# Altium PCB carrier board Ultrafiltrasi.PcbDoc (part 1 of 4)
Units mm, origin at the board's own origin, x right, y up, seen from the top; angles counter-clockwise.
Board outline 196.34 x 220.85 mm, 2 copper layers (Top Layer, Bottom Layer); 114 components, 209 nets, 667 pads, 70 vias.
Unrouted connection lines stored in the file: 5.
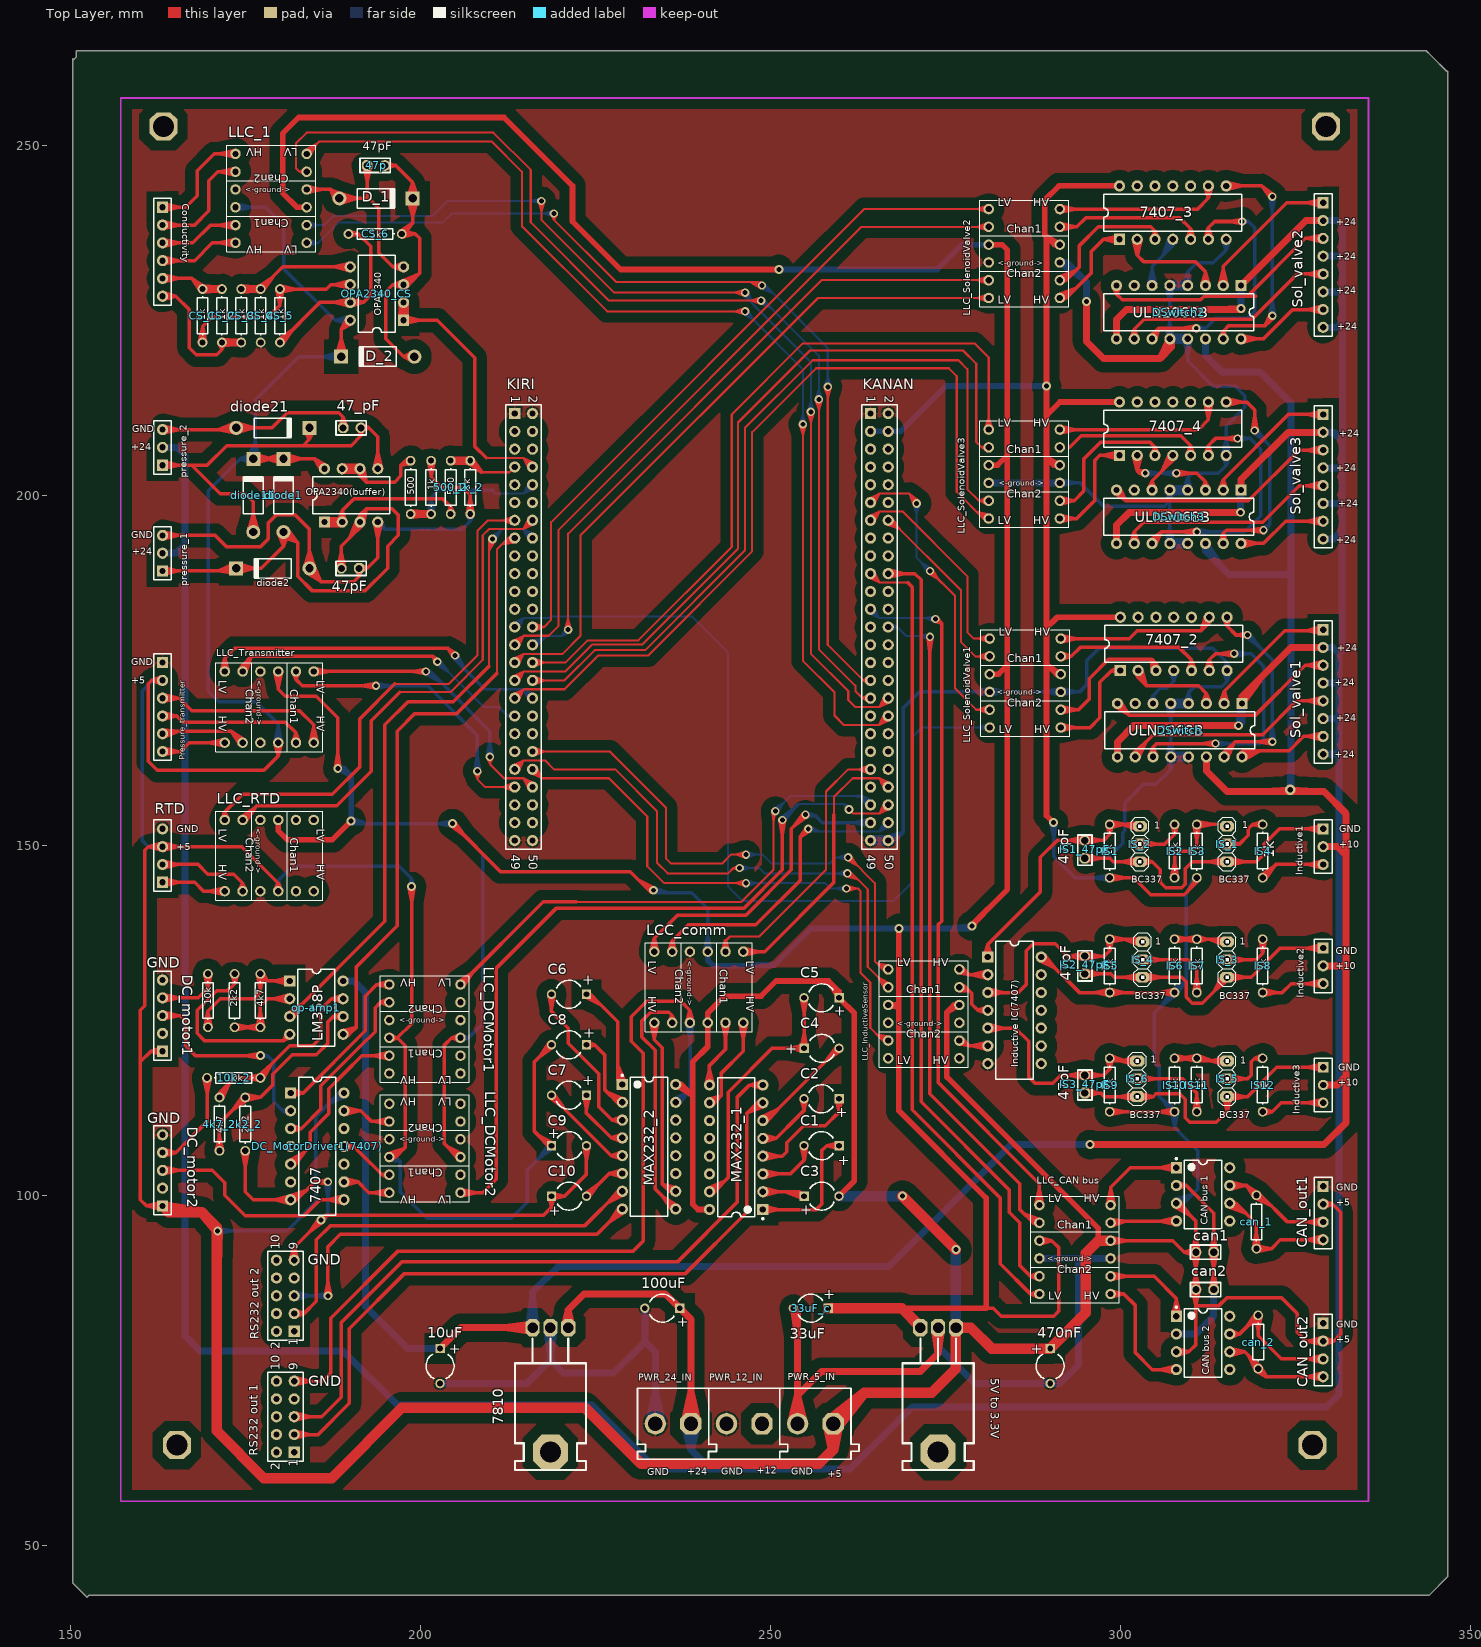
[diagram p0: Top Layer view]
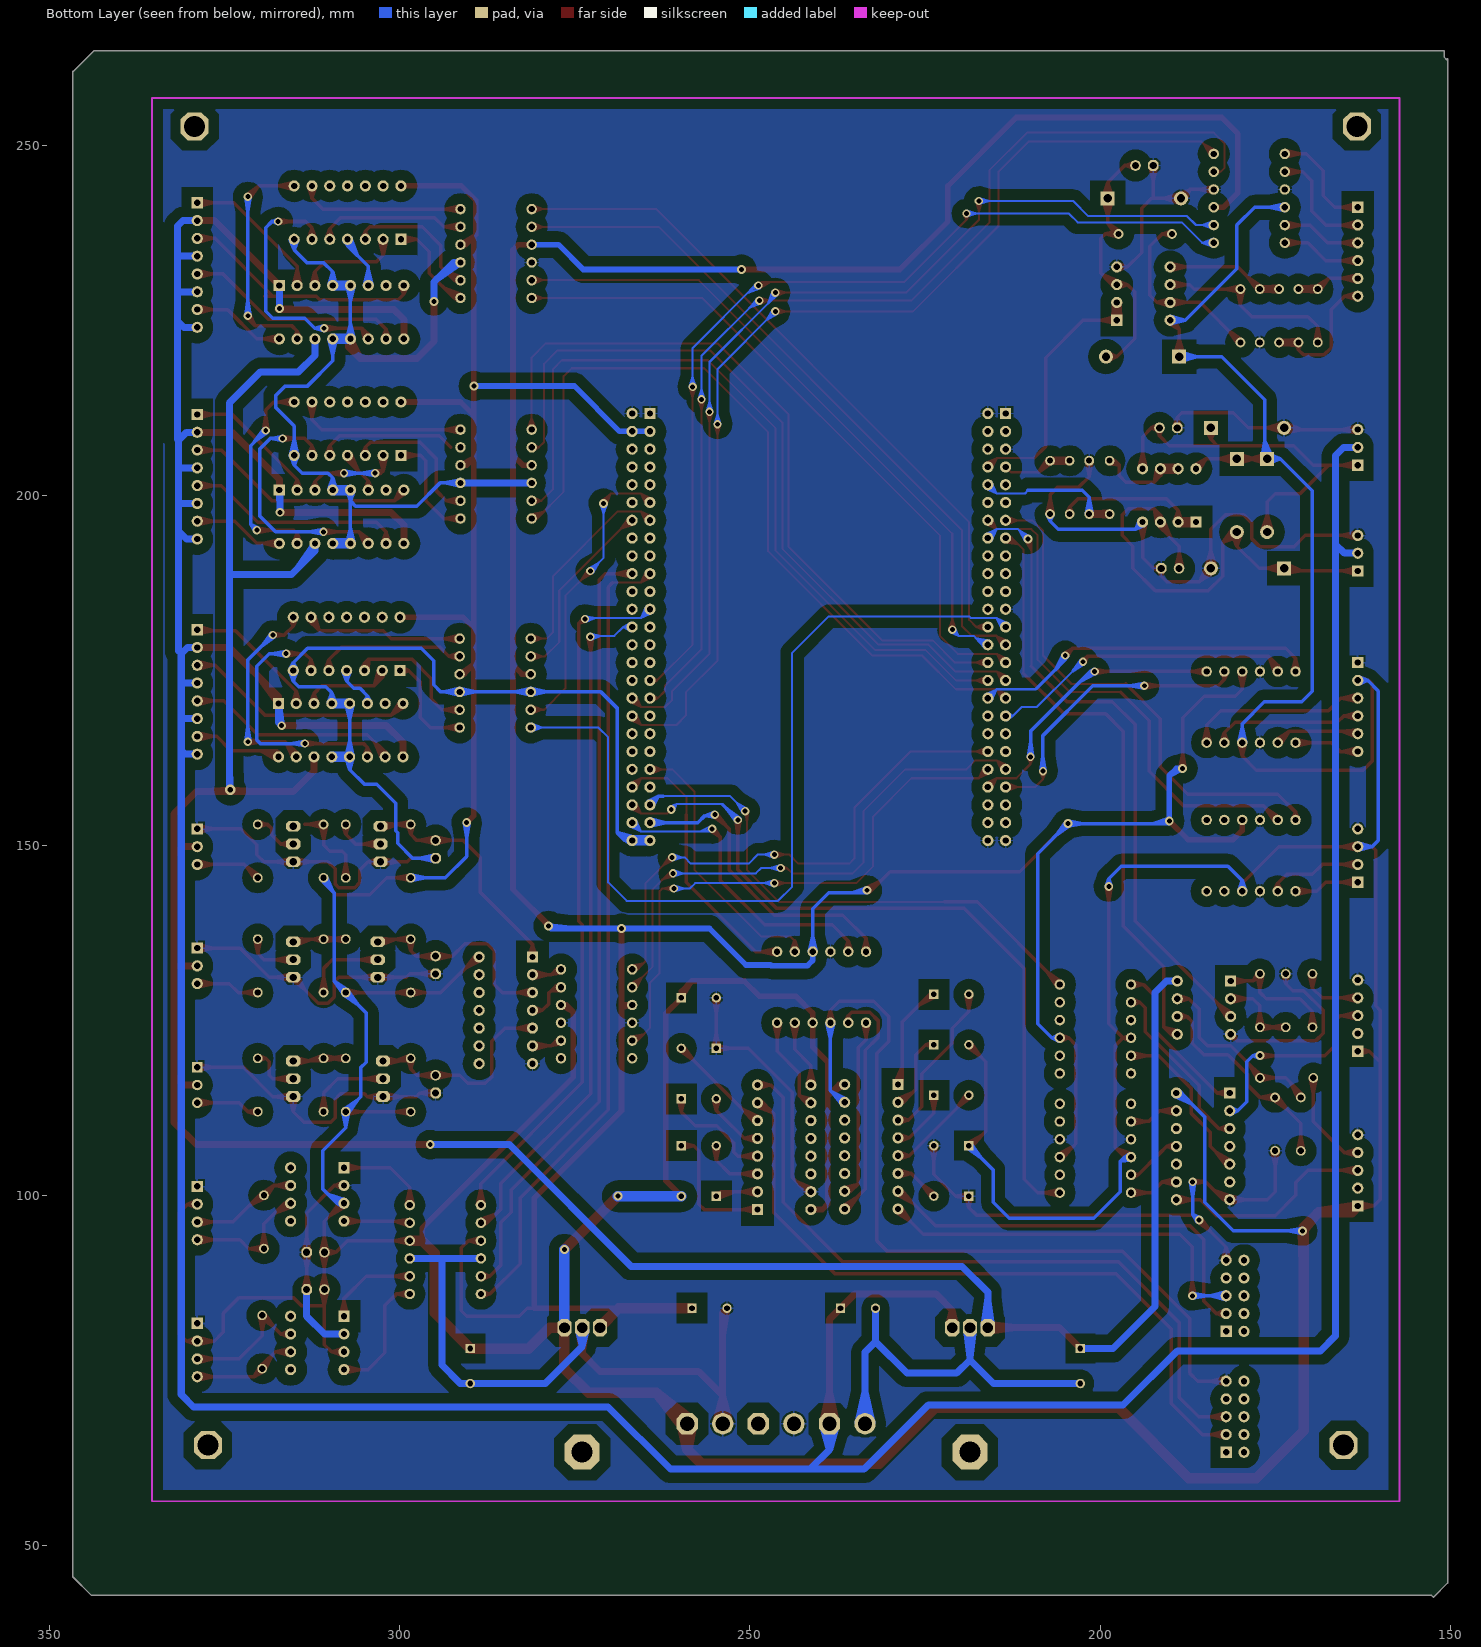
[diagram p1: Bottom Layer view, seen from below]

## Layer stack, top to bottom
Top Solder: solder mask 0.0102, Solder Resist, Dk 3.5
Top Layer: signal copper 0.0356
Dielectric 1: dielectric 0.32, FR-4, Dk 4.8
Bottom Layer: signal copper 0.0356
Bottom Solder: solder mask 0.0102, Solder Resist, Dk 3.5

## Board outline
150.368,262.382 150.368,44.704 152.4,42.672 152.654,42.926 342.646,42.926 344.043,42.926 346.71,45.593 346.71,260.604 346.583,260.604 344.424,262.763 343.662,263.525 150.876,263.525 150.876,262.636 150.495,262.255

## Design rules (kind name [scope] priority, off if disabled: settings)
Clearance [All] p1: gap=0.3
PolygonConnect [All] p1: connectstyle=Relief reliefconductorwidth=0.254 reliefentries=4 polygonreliefangle="90 Angle" airgapwidth=0.254
RoutingVias [All] p1: holewidth=0.711 width=1.27 viastyle="Through Hole" minholewidth=0.711 minwidth=1.27 maxholewidth=0.711 maxwidth=1.27
SolderMaskExpansion [All] p1: expansion=0.102
Width [All] p1: maxlimit=2 minlimit=0.3 preferedwidth=0.5 minimp=50.000000 maximp=50.000000 favimp=50.000000
29 further rules are at their usual default settings.

## Components (designator, comment, footprint, x,y, rotation, side; value= is the part's Value field where it differs from the comment)
1k "Res1" AXIAL-0.3#1 201.549,201.168 r270 top
1k_2 "1k" AXIAL-0.3#1 207.137,201.168 r90 top
2k2 "Res1" AXIAL-0.3#2 173.482,127.889 r270 top
2k2_2 "2k2" AXIAL-0.3#2 175.006,110.236 r90 top
4k7 "Res1" AXIAL-0.3#2 177.165,127.889 r90 top
4k7_2 "4k7" AXIAL-0.3#2 171.323,110.236 r90 top
"5V to 3.3V" "7805" My_TO-220 276.479,81.153 r180 top
10k "Res1" AXIAL-0.3#2 169.672,127.889 r90 top
10k_2 "10k" AXIAL-0.3#2 173.355,116.84 r180 top
10uF "Cap2" CAPR5-4X5 202.819,75.692 r270 top
33uF_c "33uF" CAPR5-4X5 255.778,83.947 r180 top
47_pF "Cap" My_cap100n 190.246,209.677 r0 top
47p "47pF" My_cap100n 193.675,247.142 r0 top
47pF "Cap" My_cap100n 189.992,189.611 r180 top
100uF "Cap2" CAPR5-4X5 234.569,83.947 r180 top
470nF "Cap2" CAPR5-4X5 289.941,75.692 r270 top
500 "Res1" AXIAL-0.3#1 198.628,201.168 r90 top
500_2 "500" AXIAL-0.3#1 204.343,201.168 r270 top
7407_2 "7407" 646-06 307.594,178.816 r0 top
7407_3 "7407" 646-06 307.467,240.411 r0 top
7407_4 "7407" 646-06 307.467,209.55 r0 top
7810 "7805" My_TO-220 221.107,81.153 r180 top
C1 "Cap2" CAPR5-4X5 257.302,107.156 r180 top
C2 "Cap2" CAPR5-4X5 257.302,113.855 r180 top
C3 "Cap2" CAPR5-4X5 257.302,99.949 r0 top
C4 "Cap2" CAPR5-4X5 257.302,121.063 r0 top
C5 "Cap2" CAPR5-4X5 257.302,128.27 r180 top
C6 "Cap2" CAPR5-4X5 221.234,128.778 r180 top
C7 "Cap2" CAPR5-4X5 221.234,114.364 r180 top
C8 "Cap2" CAPR5-4X5 221.234,121.571 r180 top
C9 "Cap2" CAPR5-4X5 221.234,107.156 r0 top
C10 "Cap2" CAPR5-4X5 221.234,99.949 r0 top
can1 "Cap" My_cap100n 312.039,91.948 r180 top
can2 "Cap" My_cap100n 312.039,86.614 r180 top
"CAN bus 1" "MCP2551-I/P" PDIP300-P8 311.785,100.203 r0 top
"CAN bus 2" "MCP2551-I/P" PDIP300-P8 311.785,78.994 r0 top
can_1 "Res1" AXIAL-0.3#2 319.405,96.266 r90 top
can_2 "Res1" AXIAL-0.3#2 319.659,79.121 r90 top
CAN_out1 "Header 4" HDR1X4 328.93,101.346 r270 top
CAN_out2 "Header 4" HDR1X4 328.93,81.788 r270 top
Conductivity "Header 6" HDR1X6 163.195,241.173 r270 top
CS_1 "1k" AXIAL-0.3#2 168.91,225.679 r270 top
CS_2 "1k" AXIAL-0.3#2 171.672,225.679 r90 top
CS_3 "1k" AXIAL-0.3#2 174.434,225.679 r90 top
CS_4 "1k" AXIAL-0.3#2 177.197,225.679 r90 top
CS_5 "1k" AXIAL-0.3#2 179.959,225.679 r270 top
CS_6 "1k" AXIAL-0.3#2 193.548,237.363 r0 top
D_1 "1N4001" DO-41 193.675,242.443 r0 top
D_2 "1N4001" DO-41 193.929,219.837 r180 top
DC_motor1 "Header 5" HDR1X5 163.195,120.65 r90 top
DC_motor2 "Header 5" HDR1X5 163.195,98.552 r90 top
DC_MotorDriver1(7407) "7407" 646-06 185.293,107.061 r270 top
diode1 "1N4001" DO-41 180.467,200.025 r90 top
diode2 "1N4001" DO-41 178.943,189.611 r180 top
diode11 "1N4001" DO-41 176.149,200.025 r90 top
diode21 "1N4001" DO-41 178.943,209.677 r0 top
DSwitch "ULN2068B" 648C-02 308.444,166.497 r180 top
DSwitch2 "ULN2068B" 648C-02 308.317,226.187 r180 top
DSwitch3 "ULN2068B" 648C-02 308.317,196.977 r180 top
Inductive1 "Header 3" HDR1X3#1 328.93,152.4 r270 top
Inductive2 "Header 3" HDR1X3#1 328.93,135.382 r270 top
Inductive3 "Header 3" HDR1X3#2 328.93,118.364 r270 top
"Inductive IC(7407)" "SN74LS14N" 646-06 284.861,126.492 r270 top
IS1 "1k" AXIAL-0.3#2 298.45,149.225 r90 top
IS1_47pF "47pF" My_cap100n 294.894,149.479 r90 top
IS2 "1k" AXIAL-0.3#2 307.721,149.225 r270 top
IS2_47pF "47pF" My_cap100n 294.894,132.969 r90 top
IS3 "1k" AXIAL-0.3#2 310.896,149.225 r90 top
IS3_47pF "47pF" My_cap100n 294.894,115.951 r90 top
IS4 "1k" AXIAL-0.3#2 320.294,149.225 r270 top
IS5 "1k" AXIAL-0.3#2 298.45,132.842 r90 top
IS6 "1k" AXIAL-0.3#2 307.721,132.842 r90 top
IS7 "1k" AXIAL-0.3#2 310.896,132.842 r90 top
IS8 "1k" AXIAL-0.3#2 320.294,132.842 r270 top
IS9 "1k" AXIAL-0.3#2 298.45,115.824 r90 top
IS10 "1k" AXIAL-0.3#2 307.721,115.824 r90 top
IS11 "1k" AXIAL-0.3#2 310.896,115.824 r90 top
IS12 "1k" AXIAL-0.3#2 320.294,115.824 r270 top
IS_1 "BC337" My_1X03 315.214,150.241 r270 top
IS_2 "BC337" My_1X03 302.768,150.241 r270 top
IS_3 "BC337" My_1X03 315.214,133.731 r270 top
IS_4 "BC337" My_1X03 303.149,133.731 r270 top
IS_5 "BC337" My_1X03 315.214,116.713 r270 top
IS_6 "BC337" My_1X03 302.387,116.713 r270 top
KANAN "KANAN" HDR2X25 264.287,211.709 r270 top
KIRI "KIRI" HDR2X25 213.487,211.709 r270 top
LCC_comm "Logic Level Converter (3.3v - 5v) /  /  / https://www.sparkfun.com/products/8745" LOGIC_LEVEL_CONVERTER 232.156,136.144 r270 top
LLC_1 "Logic Level Converter (3.3v - 5v) /  /  / https://www.sparkfun.com/products/8745" LOGIC_LEVEL_CONVERTER 185.039,250.063 r180 top
"LLC_CAN bus" "Logic Level Converter (3.3v - 5v) /  /  / https://www.sparkfun.com/products/8745" LOGIC_LEVEL_CONVERTER 287.147,84.709 r0 top
LLC_DCMotor1 "Logic Level Converter (3.3v - 5v) /  /  / https://www.sparkfun.com/products/8745" LOGIC_LEVEL_CONVERTER 207.01,131.445 r180 top
LLC_DCMotor2 "Logic Level Converter (3.3v - 5v) /  /  / https://www.sparkfun.com/products/8745" LOGIC_LEVEL_CONVERTER 207.01,114.427 r180 top
LLC_InductiveSensor "Logic Level Converter (3.3v - 5v) /  /  / https://www.sparkfun.com/products/8745" LOGIC_LEVEL_CONVERTER 265.557,118.364 r0 top
LLC_RTD "Logic Level Converter (3.3v - 5v) /  /  / https://www.sparkfun.com/products/8745" LOGIC_LEVEL_CONVERTER 170.815,154.94 r270 top
LLC_SolenoidValve1 "Logic Level Converter (3.3v - 5v) /  /  / https://www.sparkfun.com/products/8745" LOGIC_LEVEL_CONVERTER 280.035,165.608 r0 top
LLC_SolenoidValve2 "Logic Level Converter (3.3v - 5v) /  /  / https://www.sparkfun.com/products/8745" LOGIC_LEVEL_CONVERTER 279.908,226.949 r0 top
LLC_SolenoidValve3 "Logic Level Converter (3.3v - 5v) /  /  / https://www.sparkfun.com/products/8745" LOGIC_LEVEL_CONVERTER 279.908,195.453 r0 top
LLC_Transmitter "Logic Level Converter (3.3v - 5v) /  /  / https://www.sparkfun.com/products/8745" LOGIC_LEVEL_CONVERTER 170.815,176.149 r270 top
MAX232_1 "MAX232ACPE" PE16A 245.11,106.934 r180 top
MAX232_2 "MAX232ACPE" PE16A 232.664,107.002 r0 top
op-amp1 "LM358P" P008 185.166,126.873 r270 top
OPA2340(buffer) "LM358P" P008 190.119,200.025 r0 top
OPA2340_CS "OPA2340" P008 193.802,228.854 r90 top
pressure_1 "Header 3" HDR1X3#1 163.195,189.23 r90 top
pressure_2 "Header 3" HDR1X3#1 163.195,204.343 r90 top
Pressure_transmitter "Header 6" HDR1X6 163.195,176.149 r270 top
PWR_5_IN "CON2 pin blue" My_CN2 261.493,62.357 r180 top
PWR_12_IN "CON2 pin blue" My_CN2 251.333,62.357 r180 top
PWR_24_IN "CON2 pin blue" My_CN2 241.173,62.357 r180 top
"RS232 out 1" "Header 5X2" HDR2X5 181.991,63.373 r90 top
"RS232 out 2" "Header 5X2" HDR2X5 181.991,80.645 r90 top
RTD "Header 4" HDR1X4 163.195,144.78 r90 top
Sol_valve1 "Header 8" HDR1X8 328.93,180.848 r270 top
Sol_valve2 "Header 8" HDR1X8 328.93,241.808 r270 top
Sol_valve3 "Header 8" HDR1X8 328.93,211.582 r270 top

## Footprints (in the part's own frame and the unit in brackets; to place one, negate y for a bottom-side part, rotate by r counter-clockwise, add the part's x,y. Pads: shape width x height; smd on the part's side, far side on the other; paste and mask are expansions set on the pad)
646-06 [mm] "DIP; 14 Leads; Row Spacing 7.62 mm; Pitch 2.54 mm"
  rect 1.6x1.6 hole 0.9 mask+0.102: 1(-7.62,-3.81)
  round 1.6 hole 0.9 mask+0.102: 2(-5.08,-3.81) 3(-2.54,-3.81) 4(0,-3.81) 5(2.54,-3.81) 6(5.08,-3.81) 7(7.62,-3.81) 8(7.62,3.81) 9(5.08,3.81) 10(2.54,3.81) 11(0,3.81) 12(-2.54,3.81) 13(-5.08,3.81) 14(-7.62,3.81)
  silkscreen extent -9.85,-2.65 9.85,2.65
648C-02 [mm] "DIP; 16 Leads; Row Spacing 7.62 mm; Pitch 2.54 mm"
  rect 1.6x1.6 hole 0.9 mask+0.102: 1(-8.89,-3.81)
  round 1.6 hole 0.9 mask+0.102: 2(-6.35,-3.81) 3(-3.81,-3.81) 4(-1.27,-3.81) 5(1.27,-3.81) 6(3.81,-3.81) 7(6.35,-3.81) 8(8.89,-3.81) 9(8.89,3.81) 10(6.35,3.81) 11(3.81,3.81) 12(1.27,3.81) 13(-1.27,3.81) 14(-3.81,3.81) 15(-6.35,3.81) 16(-8.89,3.81)
  silkscreen extent -10.7,-2.65 10.7,2.65
AXIAL-0.3#1 [mm] "Axial Device, Thru-Hole; 2 Leads; 0.3 in Pin Spacing"
  round 1.4 hole 0.85: 1(-3.81,0) 2(3.81,0)
  silkscreen extent -2.77,-0.76 2.77,0.76
AXIAL-0.3#2 [mm] "Axial Device, Thru-Hole; 2 Leads; 0.3 in Pin Spacing"
  round 1.4 hole 0.9: 1(-3.81,0) 2(3.81,0)
  silkscreen extent -2.77,-0.76 2.77,0.76
CAPR5-4X5 [mm] "Capacitor; 2 Leads"
  rect 1.35x1.35 hole 0.8: 1(-2.5,0)
  round 1.35 hole 0.8: 2(2.5,0)
  silkscreen extent -1.69,-2 1.82,2
DO-41 [mm] "Diode, Axial; Body 5.2 x 2.7 mm (LxDia. max), Lead Dia. 0.86 mm (max)"
  round 2 hole 1.2: 1(-5.23,0)
  rect 2x2 hole 1.2: 2(5.23,0)
  silkscreen extent -2.65,-1.4 2.75,1.4
HDR1X3#1 [mm] "Connector; Header; 3 Position"
  rect 1.6x1.6 hole 0.9 mask+0.102: 1(0,0)
  round 1.6 hole 0.9 mask+0.102: 2(2.54,0) 3(5.08,0)
  silkscreen extent -1.27,-1.27 6.35,1.27
HDR1X3#2 [mm] "Connector; Header; 3 Position"
  rect 1.5x1.5 hole 0.9: 1(0,0)
  round 1.5 hole 0.9: 2(2.54,0) 3(5.08,0)
  silkscreen extent -1.27,-1.27 6.35,1.27
HDR1X4 [mm] "Connector; Header; 4 Position"
  rect 1.6x1.6 hole 0.9 mask+0.102: 1(0,0)
  round 1.6 hole 0.9 mask+0.102: 2(2.54,0) 3(5.08,0) 4(7.62,0)
  silkscreen extent -1.27,-1.27 8.89,1.27
HDR1X5 [mm] "Connector; Header; 5 Position"
  rect 1.6x1.6 hole 0.9 mask+0.102: 1(0,0)
  round 1.6 hole 0.9 mask+0.102: 2(2.54,0) 3(5.08,0) 4(7.62,0) 5(10.16,0)
  silkscreen extent -1.27,-1.27 11.43,1.27
HDR1X6 [mm] "Connector; Header; 6 Position"
  rect 1.6x1.6 hole 0.9 mask+0.102: 1(0,0)
  round 1.6 hole 0.9 mask+0.102: 2(2.54,0) 3(5.08,0) 4(7.62,0) 5(10.16,0) 6(12.7,0)
  silkscreen extent -1.27,-1.27 13.97,1.27
HDR1X8 [mm] "Connector; Header; 8 Position"
  rect 1.6x1.6 hole 0.9 mask+0.102: 1(0,0)
  round 1.6 hole 0.9 mask+0.102: 2(2.54,0) 3(5.08,0) 4(7.62,0) 5(10.16,0) 6(12.7,0) 7(15.24,0) 8(17.78,0)
  silkscreen extent -1.27,-1.27 19.05,1.27
HDR2X5 [mm] "Connector; Header; 5x2 Position"
  rect 1.6x1.6 hole 0.9 mask+0.102: 1(0,0)
  round 1.6 hole 0.9 mask+0.102: 2(0,2.54) 3(2.54,0) 4(2.54,2.54) 5(5.08,0) 6(5.08,2.54) 7(7.62,0) 8(7.62,2.54) 9(10.16,0) 10(10.16,2.54)
  silkscreen extent -1.27,-1.27 11.43,3.81
HDR2X25 [mm] "Connector; Header; 25x2 Position"
  rect 1.6x1.6 hole 0.9 mask+0.102: 1(0,0)
  round 1.6 hole 0.9 mask+0.102: 2(0,2.54) 3(2.54,0) 4(2.54,2.54) 5(5.08,0) 6(5.08,2.54) 7(7.62,0) 8(7.62,2.54) 9(10.16,0) 10(10.16,2.54) 11(12.7,0) 12(12.7,2.54) 13(15.24,0) 14(15.24,2.54) 15(17.78,0) 16(17.78,2.54) 17(20.32,0) 18(20.32,2.54) 19(22.86,0) 20(22.86,2.54) 21(25.4,0) 22(25.4,2.54) 23(27.94,0) 24(27.94,2.54) 25(30.48,0) 26(30.48,2.54) 27(33.02,0) 28(33.02,2.54) 29(35.56,0) 30(35.56,2.54) 31(38.1,0) 32(38.1,2.54) 33(40.64,0) 34(40.64,2.54) 35(43.18,0) 36(43.18,2.54) 37(45.72,0) 38(45.72,2.54) 39(48.26,0) 40(48.26,2.54) 41(50.8,0) 42(50.8,2.54) 43(53.34,0) 44(53.34,2.54) 45(55.88,0) 46(55.88,2.54) 47(58.42,0) 48(58.42,2.54) 49(60.96,0) 50(60.96,2.54)
  silkscreen extent -1.27,-1.27 62.23,3.81
LOGIC_LEVEL_CONVERTER [mm]
  round 1.5 hole 0.9: P$1(1.27,13.97) P$2(1.27,11.43) P$3(1.27,8.89) P$4(1.27,6.35) P$5(1.27,3.81) P$6(1.27,1.27) P$7(11.43,1.27) P$8(11.43,3.81) P$9(11.43,6.35) P$10(11.43,8.89) P$11(11.43,11.43) P$12(11.43,13.97)
  silkscreen extent 0,0 12.7,15.24
My_1X03 [mil]
  oct 60x80 hole 40: 1(-100,0) 2(0,0) 3(100,0)
  silkscreen extent -150,-50 150,50
My_cap100n [mil]
  oct 60x60 hole 40: 1(-50,0)
  round 60 hole 40: 2(50,0)
  silkscreen extent -90,-40 80,40
My_CN2 [mil]
  oct 120x120 hole 80: 1(99.5,-200.5)
  round 120 hole 80: 2(299.5,-200.5)
  silkscreen extent -45,-400 400,0
My_TO-220 [mil]
  oct 196.85x196.85 hole 118.11: 0(99.49,699.49)
  oct 80x100 hole 60: 1(-0.5,-0.5) 2(99.5,-0.5) 3(199.5,-0.5)
  silkscreen extent -101,60 300,800
P008 [mm] "DIP; 8 Leads; Row Spacing 7.62 mm; Pitch 2.54 mm"
  rect 1.6x1.6 hole 0.9 mask+0.102: 1(-3.81,-3.81)
  round 1.6 hole 0.9 mask+0.102: 2(-1.27,-3.81) 3(1.27,-3.81) 4(3.81,-3.81) 5(3.81,3.81) 6(1.27,3.81) 7(-1.27,3.81) 8(-3.81,3.81)
  silkscreen extent -5.5,-2.65 5.5,2.65
PDIP300-P8 [mm] "DIP, 8-Leads, Row Spacing 7.62mm, Pitch 2.54mm, Body 9.5x6.6mm"
  rect 1.6x1.6 hole 0.9 mask+0.102: 1(-3.81,3.81)
  round 1.6 hole 0.9 mask+0.102: 2(-3.81,1.27) 3(-3.81,-1.27) 4(-3.81,-3.81) 5(3.81,-3.81) 6(3.81,-1.27) 7(3.81,1.27) 8(3.81,3.81)
  silkscreen extent -3.93,-4.9 2.65,5.23, body extent -3.55,-4.9 3.55,4.9, height 5.34
PE16A [mm] "DIP, 16-Leads, Row Spacing 7.62mm, Pitch 2.54mm, Body 19.18x6.99mm"
  rect 1.6x1.6 hole 0.9 mask+0.102: 1(-3.81,8.89)
  round 1.6 hole 0.9 mask+0.102: 2(-3.81,6.35) 3(-3.81,3.81) 4(-3.81,1.27) 5(-3.81,-1.27) 6(-3.81,-3.81) 7(-3.81,-6.35) 8(-3.81,-8.89) 9(3.81,-8.89) 10(3.81,-6.35) 11(3.81,-3.81) 12(3.81,-1.27) 13(3.81,1.27) 14(3.81,3.81) 15(3.81,6.35) 16(3.81,8.89)
  silkscreen extent -3.94,-9.9 2.65,10.31, body extent -3.3,-9.9 3.3,9.9, height 5.08

## Part data
1k 2k2 4k7 10k 500 can_1 can_2: "Resistor"
1k_2 2k2_2 4k7_2 10k_2 500_2 CS_1 CS_2 CS_3 CS_4 CS_5 CS_6 IS1 IS2 IS3 IS4 IS5 IS6 IS7 IS8 IS9 IS10 IS11 IS12: library part Res1, "Resistor"
"5V to 3.3V" 7810: "Regulator"
10uF 100uF 470nF C1 C2 C3 C4 C5 C6 C7 C8 C9 C10: "Capacitor"
33uF_c: library part Cap2, "Capacitor"
47_pF 47p 47pF can1 can2 IS1_47pF IS2_47pF IS3_47pF: library part "Cap ceramic", "CAP-100Nf"
7407_2 7407_3 7407_4 DC_MotorDriver1(7407): library part SN74LS14N, "Hex Schmitt-Trigger Inverter"
"CAN bus 1" "CAN bus 2": "High-Speed CAN Transceiver, 8-Pin PDIP, Industrial Temperature"
CAN_out1 CAN_out2 RTD: "Header, 4-Pin"
Conductivity Pressure_transmitter: "Header, 6-Pin"
D_1 D_2 diode1 diode2 diode11 diode21: library part "Diode 1N4001", "1 Amp General Purpose Rectifier"
DC_motor1 DC_motor2: "Header, 5-Pin"
DSwitch DSwitch2 DSwitch3: "Quad 1.5A Darlington Switch"
Inductive1 Inductive2 Inductive3 pressure_1 pressure_2: "Header, 3-Pin"
"Inductive IC(7407)": "Hex Schmitt-Trigger Inverter"
IS_1 IS_2 IS_3 IS_4 IS_5 IS_6: "Transistor, NPN, 300MHz, 40V, 200mA, SOT-23 pkg"
KANAN KIRI: library part "Header 25X2", "Header, 25-Pin, Dual row"
LCC_comm LLC_1 "LLC_CAN bus" LLC_DCMotor1 LLC_DCMotor2 LLC_InductiveSensor LLC_RTD LLC_SolenoidValve1 LLC_SolenoidValve2 LLC_SolenoidValve3 LLC_Transmitter: library part LOGIC_LEVEL_CONVERTER
MAX232_1 MAX232_2: "+5V Powered, Multi-Channel RS-232 Driver/Receiver"
op-amp1 OPA2340(buffer): "Dual Operational Amplifier"
OPA2340_CS: library part LM358P, "Dual Operational Amplifier"
PWR_5_IN PWR_12_IN PWR_24_IN: "Connector blue screw"
"RS232 out 1" "RS232 out 2": "Header, 5-Pin, Dual row"
Sol_valve1 Sol_valve2 Sol_valve3: "Header, 8-Pin"

## Free pads (board coordinates)
  oct 4x4 hole 3: 0(329.311,252.73) 1(163.322,252.73) 2(165.227,64.389) 3(327.406,64.389)

## Via types
v1: diameter 1.2, hole 0.711, Top Layer to Bottom Layer, 26 vias
v2: diameter 1.27, hole 0.711, Top Layer to Bottom Layer, 24 vias
v3: diameter 1.2, hole 0.7, Top Layer to Bottom Layer, 19 vias
v4: diameter 1.5, hole 0.8, Top Layer to Bottom Layer, 1 vias

## Nets (pads, with @x,y where several pads share a name; then routed paths per layer and width w, separated by ;. In a path a pad name is that pad's centre, name@x,y a point inside that pad or via, vN(x,y) a via of type N, cw(c..) or ccw(c..) an arc to the next point about the centre after c; other vN are vias at no path point)
DINPLC1: Conductivity.4 LLC_1.P$12 | length 20.6
  Top Layer w0.5: Conductivity.4@163.195,233.553 167.767,233.553 170.307,236.093 LLC_1.P$12@173.609,236.093 ; Conductivity.4@163.261,233.007 165.495,233.553 Conductivity.4@163.261,234.099 ; LLC_1.P$12@173.553,235.596 171.359,236.093 LLC_1.P$12@173.553,236.59
DOPLC1: Conductivity.1 LLC_1.P$7 | length 24.8
  Top Layer w0.5: Conductivity.1@163.195,241.173 166.497,241.173 168.148,242.824 168.148,246.38 170.561,248.793 LLC_1.P$7@173.609,248.793 ; Conductivity.1@163.261,240.627 165.495,241.173 Conductivity.1@163.261,241.719 ; LLC_1.P$7@173.553,248.296 171.359,248.793 LLC_1.P$7@173.553,249.29
DOPLC2: Conductivity.2 LLC_1.P$8 | length 27.4
  Top Layer w0.5: Conductivity.2@163.195,238.633 167.767,238.633 169.799,240.665 169.799,244.983 171.069,246.253 LLC_1.P$8@173.609,246.253 171.359,246.253 ; Conductivity.2@163.261,238.087 165.495,238.633 Conductivity.2@163.261,239.179 ; LLC_1.P$8@173.553,245.756 171.359,246.253 ; LLC_1.P$8@173.553,246.75 171.359,246.253
DOPLC3: Conductivity.3 LLC_1.P$11 | length 20.6
  Top Layer w0.5: Conductivity.3@163.195,236.093 167.513,236.093 170.053,238.633 LLC_1.P$11@173.609,238.633 ; Conductivity.3@163.261,235.547 165.495,236.093 Conductivity.3@163.261,236.639 ; LLC_1.P$11@173.553,238.136 171.359,238.633 LLC_1.P$11@173.553,239.13
DTR_5V: LLC_Transmitter.P$11 Pressure_transmitter.4 | length 28.3
  Top Layer w0.5: Pressure_transmitter.4@163.195,168.529 165.227,168.529 ; Pressure_transmitter.4@163.269,167.984 165.227,168.529 ; Pressure_transmitter.4@163.269,169.074 165.227,168.529 ; LLC_Transmitter.P$11@181.753,164.808 182.245,166.116 ; LLC_Transmitter.P$11@182.245,164.719 182.245,166.116 ; LLC_Transmitter.P$11@182.737,164.808 182.245,166.116 ; 165.227,168.529 166.116,167.64 180.721,167.64 182.245,166.116
GND: 1k.1 1k_2.1 2k2.1 2k2_2.1 10uF.2 33uF_c.2 47_pF.1 47p.1 47pF.1 100uF.2 470nF.2 7407_2.7 7407_3.7 7407_4.7 7810.2 "5V to 3.3V.2" "CAN bus 1.2" "CAN bus 2.2" "Inductive IC(7407).7" "LLC_CAN bus.P$4" "LLC_CAN bus.P$9" "RS232 out 1.9" "RS232 out 2.9" C4.1 C5.2 C9.2 C10.1 can1.1 can2.1 CAN_out1.1 CAN_out2.1 CS_4.1 D_1.1 DC_motor1.5 DC_motor2.5 DC_MotorDriver1(7407).7 diode2.1 diode21.1 DSwitch2.4 DSwitch2.5 DSwitch2.12 DSwitch2.13 DSwitch3.4 DSwitch3.5 DSwitch3.12 DSwitch3.13 DSwitch.4 DSwitch.5 DSwitch.12 DSwitch.13 Inductive1.1 Inductive2.1 Inductive3.1 IS1_47pF.1 IS2_47pF.1 IS3_47pF.1 IS_1.3 IS_2.3 IS_3.3 IS_4.3 IS_5.3 IS_6.3 KANAN.1 KANAN.2 KANAN.49 KANAN.50 KIRI.1 KIRI.2 KIRI.5 KIRI.23 KIRI.49 KIRI.50 LCC_comm.P$4 LCC_comm.P$9 LLC_1.P$4 LLC_1.P$9 LLC_DCMotor2.P$4 LLC_DCMotor2.P$9 LLC_InductiveSensor.P$4 LLC_InductiveSensor.P$9 LLC_RTD.P$4 LLC_RTD.P$9 LLC_SolenoidValve1.P$4 LLC_SolenoidValve1.P$9 LLC_SolenoidValve2.P$4 LLC_SolenoidValve2.P$9 LLC_SolenoidValve3.P$4 LLC_SolenoidValve3.P$9 LLC_Transmitter.P$4 LLC_Transmitter.P$9 MAX232_1.15 MAX232_2.15 op-amp1.4 OPA2340(buffer).4 OPA2340_CS.4 pressure_1.3 pressure_2.3 Pressure_transmitter.1 PWR_5_IN.2 PWR_12_IN.2 PWR_24_IN.2 RTD.4 | length 1609.2
  Top Layer w0.5: pressure_1.3@163.195,194.31 170.688,194.31 172.339,192.659 177.165,192.659 178.308,193.802 178.308,196.088 179.451,197.231 182.118,197.231 184.173,195.176 diode2.1@184.173,189.611 ; pressure_2.3@163.195,209.423 173.482,209.423 173.736,209.677 178.816,209.677 180.975,211.836 188.341,211.836 188.976,211.201 ; pressure_1.3@163.261,193.764 165.495,194.31 pressure_1.3@163.261,194.856 ; pressure_2.3@163.261,208.877 165.495,209.423 pressure_2.3@163.261,209.969 ; 2k2.1@173.038,131.627 173.482,130.302 ; 2k2.1@173.482,131.699 173.482,130.302 ; diode21.1@173.529,210.404 171.179,209.423 ; diode21.1@173.676,209.924 171.179,209.423 ; diode21.1@173.677,208.928 171.179,209.423 ; diode21.1@173.725,209.927 176.213,209.677 ; diode21.1@173.825,208.935 176.213,209.677 ; diode21.1@173.825,210.419 176.213,209.677 ; 2k2.1@173.926,131.627 173.482,130.302 ; 2k2_2.1@174.558,106.38 175.006,104.226 2k2_2.1@175.454,106.38 ; 2k2_2.1@175.006,106.426 175.006,100.584 176.149,99.441 181.483,99.441 ; op-amp1.4@180.891,123.357 180.467,122.174 ; 181.246,99.937 183.763,100.832 ; 181.417,98.895 179.183,99.441 181.417,99.987 ; 181.447,90.886 181.991,92.672 ; op-amp1.4@181.65,122.598 180.467,122.174 ; 181.816,99.003 183.763,100.832 ; 181.991,73.533 186.055,73.533 187.222,74.7 187.222,82.536 196.737,92.051 230.354,92.051 231.857,93.554 231.857,120.351 230.148,122.061 230.148,125.589 232.321,127.762 237.236,127.762 238.506,126.492 ; 181.991,90.805 181.991,92.672 ; 182.057,72.987 184.291,73.533 182.057,74.079 ; 182.535,90.886 181.991,92.672 ; diode2.1@183.431,189.724 184.173,192.111 ; diode2.1@183.682,189.044 185.801,187.706 ; LLC_1.P$4@183.769,243.713 187.198,243.713 187.186,243.701 ; LLC_1.P$4@183.825,243.216 186.019,243.713 LLC_1.P$4@183.825,244.21 ; diode2.1@183.923,189.623 184.173,192.111 ; diode2.1@183.991,189.439 185.801,187.706 ; diode2.1@184.371,189.764 185.801,187.706 ; diode2.1@184.423,189.623 184.173,192.111 ; diode2.1@184.81,190.007 185.801,187.706 ; diode2.1@184.915,189.724 184.173,192.111 ; v2@185.545,96.77 184.143,94.824 ; v2@185.621,96.838 186.577,97.258 ; v2(185.839,96.52) 184.143,94.824 ; v2@186.088,96.227 184.143,94.824 ; v2@186.156,96.303 186.577,97.258 ; v3@186.759,101.633 184.912,101.981 ; v3@186.759,102.329 184.912,101.981 ; v3(186.792,101.981) 184.912,101.981 ; D_1.1@187.815,242.036 187.186,243.701 ; D_1.1@188.256,242.279 187.186,243.701 ; D_1.1@188.457,242.193 190.945,242.443 ; D_1.1@188.457,242.693 190.945,242.443 ; 47_pF.1@188.471,209.763 188.976,211.201 ; D_1.1@188.557,241.701 190.945,242.443 ; D_1.1@188.557,243.185 190.945,242.443 ; D_1.1@188.609,242.632 187.186,243.701 ; D_1.1@188.852,243.073 187.186,243.701 ; 47_pF.1@188.976,209.677 188.976,211.201 ; 47_pF.1@189.481,209.763 188.976,211.201 ; 47pF.1@190.763,189.496 191.262,188.468 ; 47pF.1@191.377,189.112 192.405,189.611 ; 47pF.1@191.377,190.11 192.405,189.611 ; 47pF.1@191.761,189.496 191.262,188.468 ; 47p.1@191.896,247.084 192.405,244.88 47p.1@192.914,247.084 ; 47p.1@192.405,247.142 192.405,242.697 192.659,242.443 ; 193.383,196.149 193.929,193.915 194.475,196.149 ; 193.929,196.215 193.929,191.135 192.405,189.611 ; OPA2340_CS.4@197.513,232.123 196.088,232.664 ; OPA2340_CS.4@197.513,233.205 196.088,232.664 ; OPA2340_CS.4@197.612,232.664 196.088,232.664 ; 1k.1@201.101,204.932 201.549,202.778 1k.1@201.997,204.932 ; 1k.1@201.549,204.978 201.549,202.692 203.073,201.168 206.121,201.168 207.137,200.152 1k_2.1@207.137,197.358 ; 1k_2.1@206.689,197.404 207.137,199.558 1k_2.1@207.585,197.404 ; C10.1@218.313,99.893 218.734,98.338 ; C10.1@218.782,99.527 220.599,99.949 ; C10.1@218.782,100.371 220.599,99.949 ; C10.1@219.155,99.893 218.734,98.338 ; C9.2@223.311,107.115 223.734,104.981 ; C9.2@224.157,107.115 223.734,104.981 ; LCC_comm.P$9@238.011,124.784 238.506,126.492 ; LCC_comm.P$9@238.506,124.714 238.506,126.492 ; LCC_comm.P$9@239.001,124.784 238.506,126.492 ; MAX232_1.15@241.032,101.065 243.442,102.091 ; MAX232_1.15@241.662,100.17 243.442,102.091 ; C4.1@254.379,121.104 254.802,123.238 C4.1@255.225,121.104 ; C5.2@254.379,128.228 254.802,126.095 C5.2@255.225,128.228 ; C4.1@254.76,120.64 252.627,121.063 ; C4.1@254.76,121.486 252.627,121.063 ; C5.2@254.802,128.27 C4.1@254.802,121.063 ; IS3_47pF.1@294.894,114.681 297.156,114.681 ; IS2_47pF.1@294.894,131.699 298.577,131.699 299.085,131.191 IS_4.3@303.149,131.191 308.737,131.191 309.372,130.556 309.372,128.397 310.261,127.508 311.658,127.508 315.214,131.064 IS_3.3@315.214,131.191 318.643,131.191 322.834,135.382 Inductive2.1@328.93,135.382 ; IS1_47pF.1@294.894,148.209 298.45,148.209 298.958,147.701 IS_2.3@302.768,147.701 304.546,147.701 ; IS3_47pF.1@294.952,114.172 297.156,114.681 ; IS3_47pF.1@294.952,115.19 297.156,114.681 ; IS2_47pF.1@294.952,131.19 297.156,131.699 IS2_47pF.1@294.952,132.208 ; IS1_47pF.1@294.952,147.7 297.156,148.209 IS1_47pF.1@294.952,148.718 ; IS_6.3@302.075,113.664 299.871,114.173 ; IS_6.3@302.075,114.682 299.871,114.173 ; IS_6.3@302.133,114.173 299.871,114.173 ; IS_2.3@302.456,147.192 300.252,147.701 ; IS_2.3@302.456,148.21 300.252,147.701 ; IS_2.3@302.514,147.701 300.252,147.701 ; IS_6.3@302.641,114.173 304.673,114.173 ; IS_6.3@302.706,113.665 304.673,114.173 ; IS_6.3@302.706,114.681 304.673,114.173 ; IS_4.3@302.837,130.682 300.633,131.191 ; IS_4.3@302.837,131.7 300.633,131.191 ; IS_4.3@302.895,131.191 300.633,131.191 ; IS_2.3@303.022,147.701 304.546,147.701 ; IS_2.3@303.108,147.196 304.546,147.701 ; IS_2.3@303.108,148.206 304.546,147.701 ; IS_4.3@303.403,131.191 305.665,131.191 ; IS_4.3@303.461,130.682 305.665,131.191 ; IS_4.3@303.461,131.7 305.665,131.191 ; 307.975,101.473 309.372,101.473 ; 308.083,100.934 309.372,101.473 ; 308.083,102.012 309.372,101.473 ; can2.1@312.8,86.672 313.309,88.876 can2.1@313.818,86.672 ; can1.1@312.8,91.89 313.309,89.686 can1.1@313.818,91.89 ; can1.1@312.8,92.006 313.309,94.21 can1.1@313.818,92.006 ; can2.1@313.309,86.614 can1.1@313.309,91.948 313.309,97.536 309.372,101.473 ; IS_3.3@314.528,131.465 313.466,129.316 ; IS_5.3@314.706,114.112 315.214,112.014 ; IS_1.3@314.902,147.192 312.698,147.701 ; IS_1.3@314.902,148.21 312.698,147.701 ; IS_3.3@314.96,131.191 313.466,129.316 ; IS_1.3@314.96,147.701 312.698,147.701 ; IS_3.3@315.324,130.831 313.466,129.316 ; IS_5.3@315.468,114.173 317.73,114.173 ; IS_3.3@315.468,131.191 317.73,131.191 ; IS_1.3@315.468,147.701 317.73,147.701 ; IS_5.3@315.526,113.664 317.73,114.173 ; IS_5.3@315.526,114.682 317.73,114.173 ; IS_3.3@315.526,130.682 317.73,131.191 ; IS_3.3@315.526,131.7 317.73,131.191 ; IS_1.3@315.526,147.192 317.73,147.701 ; IS_1.3@315.526,148.21 317.73,147.701 ; IS_5.3@315.722,114.112 315.214,112.014 ; Inductive2.1@328.864,134.836 326.63,135.382 Inductive2.1@328.864,135.928 ; Inductive1.1@328.864,151.854 326.63,152.4 Inductive1.1@328.864,152.946 ; Inductive3.1@328.874,117.867 326.68,118.364 Inductive3.1@328.874,118.861 ; Inductive3.1@328.93,118.364 322.326,118.364 318.135,114.173 IS_5.3@315.214,114.173 315.214,112.014 ; Inductive1.1@328.93,152.4 322.707,152.4 320.421,150.114 320.421,148.717 319.405,147.701 IS_1.3@315.214,147.701 310.261,147.701 309.245,146.685 309.245,144.526 308.737,144.018 306.451,144.018 305.689,144.78 305.689,146.558 304.546,147.701 ; 171.179,209.423 diode21.1@173.713,209.677 176.213,209.677 ; 171.179,209.423 173.726,209.427 176.213,209.677 ; 173.482,130.302 172.466,129.286 170.942,129.286 168.148,126.492 168.148,123.19 169.164,122.174 180.467,122.174 ; 180.467,122.174 op-amp1.4@181.356,123.063 180.467,122.174 ; 181.483,99.441 182.372,99.441 ; 181.483,99.441 183.763,100.832 ; 181.483,99.441 182.372,99.441 ; 181.991,92.672 186.577,97.258 ; 182.372,99.441 181.653,98.918 182.372,99.441 ; 182.372,99.441 181.653,99.964 182.372,99.441 ; 182.372,99.441 184.912,101.981 ; diode2.1@184.173,189.611 185.801,187.706 ; diode2.1@184.173,189.611 184.173,189.334 185.801,187.706 ; 185.801,187.706 190.5,187.706 191.262,188.468 ; 186.577,97.258 217.654,97.258 218.734,98.338 ; 187.186,243.701 D_1.1@188.445,242.443 192.659,242.443 ; 191.262,188.468 47pF.1@191.262,189.611 192.405,189.611 ; 192.659,242.443 194.056,241.046 194.056,234.696 196.088,232.664 ; 218.734,98.338 C10.1@218.734,99.949 220.599,99.949 ; 220.599,99.949 223.734,103.084 C9.2@223.734,107.156 223.734,104.981 ; 243.442,102.091 MAX232_1.15@241.3,100.584 241.935,100.584 243.967,102.616 243.967,114.808 250.222,121.063 C4.1@254.802,121.063 ; 252.627,121.063 C4.1@254.802,121.063 ; 297.156,114.681 297.664,114.173 IS_6.3@302.387,114.173 304.673,114.173 ; 304.673,114.173 305.054,114.554 308.483,114.554 309.245,113.792 309.245,111.125 309.88,110.49 313.69,110.49 315.214,112.014
  Top Layer w1: PWR_5_IN.2@252.87,67.579 253.886,71.501 ; PWR_5_IN.2@253.886,67.45 253.886,71.501 ; 253.886,80.06 33uF_c.2@253.278,83.947 253.886,83.339 253.886,71.501 ; PWR_5_IN.2@254.901,67.579 253.886,71.501 ; 273.437,80.873 273.952,77.483 ; 273.952,80.912 273.952,77.483 ; 273.952,81.166 273.952,77.483 ; 274.466,80.873 273.952,77.483 ; 295.148,224.076 v2(295.148,227.711) 295.148,221.996 297.567,219.577 305.667,219.577 ; DSwitch2.12@307.307,221.651 307.307,221.217 ; 253.886,71.501 257.315,74.93 271.399,74.93 273.952,77.483 ; 305.667,219.577 DSwitch2.12@307.047,222.377 ; 305.667,219.577 307.307,221.217 ; DSwitch2.12@307.047,222.377 307.307,221.217 ; DSwitch2.12@307.047,222.377 307.307,221.217
  Bottom Layer w0.5: v2@185.626,96.841 186.792,97.384 ; v2@185.801,96.393 186.792,97.384 ; v2(185.839,96.52) 186.792,97.384 ; v2@186.137,96.277 186.792,97.384 ; v3@186.443,101.952 186.792,99.881 v3@187.141,101.952 ; v3(186.792,101.981) 186.792,97.384 ; 193.622,195.759 194.945,195.199 ; 193.929,196.215 194.945,195.199 ; 194.385,196.522 194.945,195.199 ; 1k_2.1@206.698,197.258 207.137,196.342 ; 1k_2.1@207.137,197.358 207.137,196.342 ; 1k_2.1@207.576,197.258 207.137,196.342 ; MAX232_2.15@236.173,113.813 238.455,114.974 ; MAX232_2.15@236.866,112.966 238.455,114.974 ; LCC_comm.P$9@238.01,124.654 238.524,122.464 ; LCC_comm.P$9@239.003,124.662 238.524,122.464 ; KANAN.49@264.287,150.749 KANAN.50@266.827,150.749 ; KANAN.49@264.353,150.203 266.587,150.749 KANAN.49@264.353,151.295 ; KANAN.50@266.626,151.261 268.986,151.892 ; KANAN.50@266.647,150.229 KANAN.49@264.56,151.245 ; KANAN.50@266.647,151.269 KANAN.49@264.56,150.253 ; KANAN.50@266.761,150.203 264.527,150.749 KANAN.50@266.761,151.295 ; KANAN.50@266.88,150.202 KANAN.49@264.56,150.253 ; KANAN.50@266.88,151.296 KANAN.49@264.56,151.245 ; KANAN.50@267.137,150.295 268.986,151.892 ; LLC_SolenoidValve1.P$4@281.249,171.461 279.055,171.958 LLC_SolenoidValve1.P$4@281.249,172.455 ; LLC_SolenoidValve1.P$4@281.361,171.461 283.555,171.958 LLC_SolenoidValve1.P$4@281.361,172.455 ; LLC_SolenoidValve3.P$9@291.338,201.803 294.259,201.803 297.561,198.501 306.324,198.501 307.047,199.224 ; LLC_SolenoidValve3.P$9@291.394,201.306 293.588,201.803 LLC_SolenoidValve3.P$9@291.394,202.3 ; LLC_SolenoidValve1.P$9@291.409,171.461 289.215,171.958 LLC_SolenoidValve1.P$9@291.409,172.455 ; LLC_SolenoidValve1.P$9@291.521,171.461 293.715,171.958 LLC_SolenoidValve1.P$9@291.521,172.455 ; IS1_47pF.1@294.894,148.209 298.196,148.209 300.318,150.331 300.318,151.862 300.6,152.144 300.6,156.074 303.276,158.75 305.054,158.75 307.174,160.87 ; IS1_47pF.1@294.952,147.7 297.156,148.209 IS1_47pF.1@294.952,148.718 ; DSwitch3.12@306.501,193.233 307.047,195.467 DSwitch3.12@307.593,193.233 ; DSwitch2.12@306.501,222.443 307.047,224.677 DSwitch2.12@307.593,222.443 ; DSwitch2.5@306.501,229.931 307.047,227.697 DSwitch2.5@307.593,229.931 ; DSwitch3.5@306.506,200.69 307.047,199.224 ; DSwitch.12@306.628,162.753 307.174,164.987 DSwitch.12@307.72,162.753 ; DSwitch.5@306.628,170.241 307.174,168.007 DSwitch.5@307.72,170.241 ; DSwitch.12@306.63,162.604 307.174,160.87 ; DSwitch3.12@307.113,192.621 309.347,193.167 DSwitch3.12@307.113,193.713 ; DSwitch3.5@307.113,200.241 309.347,200.787 DSwitch3.5@307.113,201.333 ; DSwitch2.12@307.113,221.831 309.347,222.377 DSwitch2.12@307.113,222.923 ; DSwitch2.5@307.113,229.451 309.347,229.997 DSwitch2.5@307.113,230.543 ; DSwitch.12@307.24,162.141 309.474,162.687 DSwitch.12@307.24,163.233 ; DSwitch.5@307.24,169.761 309.474,170.307 DSwitch.5@307.24,170.853 ; DSwitch3.5@307.588,200.69 307.047,199.224 ; DSwitch.12@307.718,162.604 307.174,160.87 ; DSwitch2.13@309.041,222.311 309.587,220.077 DSwitch2.13@310.133,222.311 ; DSwitch2.4@309.043,230.075 309.587,231.941 ; DSwitch3.4@309.044,200.874 309.587,202.526 ; DSwitch.4@309.173,170.404 309.714,171.87 ; DSwitch3.13@309.407,192.647 DSwitch3.12@307.32,193.663 ; DSwitch3.13@309.407,193.687 DSwitch3.12@307.32,192.671 ; DSwitch3.4@309.407,200.267 DSwitch3.5@307.32,201.283 ; DSwitch3.4@309.407,201.307 DSwitch3.5@307.32,200.291 ; DSwitch2.13@309.407,221.857 DSwitch2.12@307.32,222.873 ; DSwitch2.13@309.407,222.897 DSwitch2.12@307.32,221.881 ; DSwitch2.4@309.407,229.477 DSwitch2.5@307.32,230.493 ; DSwitch2.4@309.407,230.517 DSwitch2.5@307.32,229.501 ; DSwitch3.13@309.521,192.621 307.287,193.167 DSwitch3.13@309.521,193.713 ; DSwitch3.4@309.521,200.241 307.287,200.787 DSwitch3.4@309.521,201.333 ; DSwitch2.13@309.521,221.831 307.287,222.377 DSwitch2.13@309.521,222.923 ; DSwitch2.4@309.521,229.451 307.287,229.997 DSwitch2.4@309.521,230.543 ; DSwitch.13@309.534,162.167 DSwitch.12@307.447,163.183 ; DSwitch.13@309.534,163.207 DSwitch.12@307.447,162.191 ; DSwitch.4@309.534,169.787 DSwitch.5@307.447,170.803 ; DSwitch.4@309.534,170.827 DSwitch.5@307.447,169.811 ; DSwitch3.13@309.64,192.62 DSwitch3.12@307.32,192.671 ; DSwitch3.13@309.64,193.714 DSwitch3.12@307.32,193.663 ; DSwitch3.4@309.64,200.24 DSwitch3.5@307.32,200.291 ; DSwitch3.4@309.64,201.334 DSwitch3.5@307.32,201.283 ; DSwitch2.13@309.64,221.83 DSwitch2.12@307.32,221.881 ; DSwitch2.13@309.64,222.924 DSwitch2.12@307.32,222.873 ; DSwitch2.4@309.64,229.45 DSwitch2.5@307.32,229.501 ; DSwitch2.4@309.64,230.544 DSwitch2.5@307.32,230.493 ; DSwitch.13@309.648,162.141 307.414,162.687 DSwitch.13@309.648,163.233 ; DSwitch.4@309.648,169.761 307.414,170.307 DSwitch.4@309.648,170.853 ; DSwitch.13@309.767,162.14 DSwitch.12@307.447,162.191 ; DSwitch.13@309.767,163.234 DSwitch.12@307.447,163.183 ; DSwitch.4@309.767,169.76 DSwitch.5@307.447,169.811 ; DSwitch.4@309.767,170.854 DSwitch.5@307.447,170.803 ; DSwitch3.4@310.13,200.874 309.587,202.526 ; DSwitch2.4@310.132,230.075 309.587,231.941 ; DSwitch.4@310.255,170.404 309.714,171.87 ; 7407_4.7@314.541,205.806 315.087,208.04 7407_4.7@315.633,205.806 ; 7407_3.7@314.546,236.502 315.087,235.077 ; 7407_4.7@314.548,205.632 315.087,204.343 ; 7407_2.7@314.673,174.907 315.214,173.482 ; 7407_2.7@314.68,175.138 315.214,176.149 ; 7407_3.7@315.087,236.601 315.087,235.077 ; 7407_4.7@315.626,205.632 315.087,204.343 ; 7407_3.7@315.628,236.502 315.087,235.077 ; 7407_2.7@315.748,175.138 315.214,176.149 ; 7407_2.7@315.755,174.907 315.214,173.482 ; 194.945,195.199 205.994,195.199 207.137,196.342 ; 238.455,114.974 MAX232_2.15@236.474,113.352 236.833,113.352 238.524,115.043 238.524,124.696 LCC_comm.P$9@238.506,124.714 238.524,122.464 ; KANAN.49@264.56,150.253 KANAN.50@266.827,150.749 ; KANAN.49@264.56,151.245 KANAN.50@266.827,150.749 ; KANAN.50@266.827,150.749 267.843,150.749 ; KANAN.50@266.827,150.749 268.986,151.892 ; KANAN.50@266.827,150.749 267.843,150.749 ; 267.843,150.749 266.976,150.22 267.843,150.749 ; 267.843,150.749 266.976,151.278 267.843,150.749 ; 267.843,150.749 268.986,151.892 ; 268.986,151.892 268.986,169.672 271.272,171.958 LLC_SolenoidValve1.P$4@281.305,171.958 LLC_SolenoidValve1.P$9@291.465,171.958 294.132,171.958 295.148,172.974 295.148,176.403 296.926,178.181 313.182,178.181 315.214,176.149 ; 307.047,199.224 DSwitch3.5@307.047,200.787 DSwitch3.4@309.587,200.787 ; 307.047,199.224 DSwitch3.12@307.047,193.167 DSwitch3.13@309.587,193.167 ; 307.174,160.87 DSwitch.12@307.174,162.687 ; DSwitch.12@307.174,162.687 DSwitch.5@307.174,170.307 DSwitch.4@309.714,170.307 ; DSwitch.12@307.174,162.687 DSwitch.13@309.714,162.687 ; DSwitch3.12@307.32,192.671 DSwitch3.13@309.587,193.167 ; DSwitch3.12@307.32,193.663 DSwitch3.13@309.587,193.167 ; DSwitch3.5@307.32,200.291 DSwitch3.4@309.587,200.787 ; DSwitch3.5@307.32,201.283 DSwitch3.4@309.587,200.787 ; DSwitch2.12@307.32,221.881 DSwitch2.13@309.587,222.377 ; DSwitch2.12@307.32,222.873 DSwitch2.13@309.587,222.377 ; DSwitch2.5@307.32,229.501 DSwitch2.4@309.587,229.997 ; DSwitch2.5@307.32,230.493 DSwitch2.4@309.587,229.997 ; DSwitch.12@307.447,162.191 DSwitch.13@309.714,162.687 ; DSwitch.12@307.447,163.183 DSwitch.13@309.714,162.687 ; DSwitch.5@307.447,169.811 DSwitch.4@309.714,170.307 ; DSwitch.5@307.447,170.803 DSwitch.4@309.714,170.307 ; DSwitch3.4@309.587,200.787 309.587,202.526 ; 309.587,202.526 310.261,203.2 313.944,203.2 315.087,204.343 ; DSwitch2.13@309.587,222.377 DSwitch2.12@307.047,222.377 DSwitch2.5@307.047,229.997 DSwitch2.4@309.587,229.997 ; DSwitch2.13@309.587,222.377 309.587,219.241 313.182,215.646 316.357,215.646 317.754,214.249 317.754,212.598 315.087,209.931 7407_4.7@315.087,205.74 315.087,204.343 ; DSwitch2.4@309.587,229.997 309.587,231.941 ; 309.587,231.941 310.896,233.25 313.26,233.25 315.087,235.077 ; DSwitch.4@309.714,170.307 309.714,171.87 ; 309.714,171.87 310.564,172.72 314.452,172.72 315.214,173.482 ; 315.214,173.482 7407_2.7@315.214,175.006 315.214,176.149
  Bottom Layer w1: 10uF.2@202.819,73.192 215.203,73.192 218.58,76.568 ; 7810.2@218.065,80.879 218.58,76.896 ; 7810.2@218.58,80.912 218.58,76.896 ; 7810.2@218.58,81.166 218.58,76.568 ; 7810.2@219.095,80.879 218.58,76.896 ; 100uF.2@232.069,83.947 232.069,79.161 ; PWR_24_IN.2@232.548,67.566 233.566,71.974 PWR_24_IN.2@234.583,67.566 ; PWR_24_IN.2@233.566,67.45 233.566,77.664 232.069,79.161 ; 273.439,80.857 273.952,78.473 ; 273.952,80.912 273.952,78.473 ; 273.952,81.166 273.952,78.473 ; 274.465,80.857 273.952,78.473 ; LLC_SolenoidValve3.P$4@281.178,201.803 LLC_SolenoidValve3.P$9@291.338,201.803 ; 288.417,91.059 294.005,91.059 ; 294.735,230.918 LLC_SolenoidValve2.P$9@291.338,233.299 ; v2(295.148,227.711) 295.148,230.505 292.354,233.299 ; 298.577,91.059 294.005,91.059 ; 307.975,80.264 310.769,80.264 313.309,82.804 can2.1@313.309,86.614 ; 218.58,76.568 220.472,74.676 227.584,74.676 232.069,79.161 ; 273.952,78.473 279.233,73.192 470nF.2@289.941,73.192 291.378,73.192 294.005,75.819 294.005,91.059 ; LLC_SolenoidValve2.P$9@291.338,233.299 292.354,233.299 ; LLC_SolenoidValve2.P$9@291.338,233.299 292.354,233.299
Net1k_2: 1k.2 500.1 KIRI.10 | length 60.7
  Top Layer w0.5: 500.1@198.611,196.908 200.835,197.049 ; 500.1@198.611,197.808 200.835,197.667 ; 500.1@198.674,196.91 200.828,197.358 500.1@198.674,197.806 ; 500.1@198.735,196.921 200.835,197.667 ; 500.1@198.735,197.795 200.835,197.049 ; 1k.2@201.503,196.91 199.349,197.358 ; 1k.2@201.503,197.806 199.349,197.358 ; 1k.2@201.549,197.358 500.1@198.628,197.358 ; 500.1@198.628,197.358 199.349,197.358 ; 500.1@198.628,197.358 200.835,197.049 ; 500.1@198.628,197.358 199.349,197.358 ; 500.1@198.628,197.358 200.835,197.667 ; 199.349,197.358 198.768,196.93 199.349,197.358 ; 199.349,197.358 198.768,197.786 199.349,197.358
  Bottom Layer w0.3: 210.312,200.787 210.312,200.7 210.713,200.299 214.777,200.299 ; KIRI.10@215.491,201.916 214.777,200.299 ; KIRI.10@215.756,201.771 214.777,200.299 ; KIRI.10@216.249,201.278 214.777,200.299 ; KIRI.10@216.394,201.013 214.777,200.299 ; 214.777,200.299 KIRI.10@216.027,201.549 214.777,200.299
  Bottom Layer w0.5: 1k.2@201.101,197.404 201.549,199.558 1k.2@201.997,197.404 ; 1k.2@201.549,197.358 201.549,199.771 202.565,200.787 210.312,200.787
Net1k_2_2: 1k_2.2 500_2.1 KIRI.7 | length 39.3
  Top Layer w0.3: 208.788,203.327 212.725,203.327 KIRI.7@213.487,204.089
  Top Layer w0.5: 500_2.1@204.343,204.978 1k_2.2@207.137,204.978 ; 500_2.1@204.389,204.53 206.543,204.978 500_2.1@204.389,205.426 ; 1k_2.2@206.851,204.631 208.788,203.327 ; 1k_2.2@207.025,204.542 500_2.1@204.922,205.315 ; 1k_2.2@207.025,205.414 500_2.1@204.922,204.641 ; 1k_2.2@207.091,204.53 500_2.1@204.937,204.978 ; 1k_2.2@207.091,205.426 500_2.1@204.937,204.978 ; 1k_2.2@207.16,204.529 500_2.1@204.922,204.641 ; 1k_2.2@207.16,205.427 500_2.1@204.922,205.315 ; 1k_2.2@207.484,205.264 208.788,203.327 ; 500_2.1@204.922,204.641 1k_2.2@207.137,204.978 ; 500_2.1@204.922,205.315 1k_2.2@207.137,204.978 ; 500_2.1@204.937,204.978 1k_2.2@207.137,204.978 ; 1k_2.2@207.137,204.978 208.788,203.327
Net2k2_2: 2k2.2 4k7.1 op-amp1.2 | length 31.4
  Top Layer w0.5: 2k2.2@173.482,124.079 4k7.1@177.165,124.079 177.165,127.127 178.181,128.143 op-amp1.2@181.356,128.143 179.056,128.143 ; 2k2.2@173.528,123.631 175.682,124.079 2k2.2@173.528,124.527 ; 4k7.1@176.717,124.125 177.165,126.279 4k7.1@177.613,124.125 ; 4k7.1@177.119,123.631 174.965,124.079 4k7.1@177.119,124.527 ; op-amp1.2@181.29,127.597 179.056,128.143 ; op-amp1.2@181.29,128.689 179.056,128.143
Net2k2_2_2: 2k2_2.2 4k7_2.1 op-amp1.6 | length 51
  Top Layer w0.5: 4k7_2.1@170.875,106.472 171.323,108.626 4k7_2.1@171.771,106.472 ; 4k7_2.1@171.323,106.426 171.323,110.363 2k2_2.2@175.006,114.046 ; 2k2_2.2@174.66,114.334 173.245,112.285 ; 2k2_2.2@175.053,113.598 177.165,114.046 ; 2k2_2.2@175.053,114.494 177.165,114.046 ; 2k2_2.2@175.294,113.7 173.245,112.285 ; op-amp1.6@188.868,125.064 187.579,125.603 ; op-amp1.6@188.868,126.142 187.579,125.603 ; 173.245,112.285 2k2_2.2@175.006,114.046 ; 2k2_2.2@175.006,114.046 177.165,114.046 ; 177.165,114.046 178.943,115.824 178.943,117.348 181.737,120.142 185.166,120.142 186.817,121.793 186.817,124.841 187.579,125.603 ; 187.579,125.603 op-amp1.6@188.976,125.603 187.579,125.603
Net4k7_2: 4k7.2 10k.1 op-amp1.1 | length 36.7
  Top Layer w0.5: 10k.1@169.224,124.125 169.672,126.279 10k.1@170.12,124.125 ; 10k.1@169.672,124.079 169.672,126.365 171.45,128.143 176.276,128.143 177.165,129.032 4k7.2@177.165,131.699 178.181,130.683 ; 4k7.2@176.717,131.653 177.165,129.499 4k7.2@177.613,131.653 ; 4k7.2@176.901,131.335 178.181,130.683 ; 4k7.2@177.529,131.963 178.181,130.683 ; op-amp1.1@181.29,130.137 179.056,130.683 ; op-amp1.1@181.29,131.229 179.056,130.683 ; 178.181,130.683 op-amp1.1@181.356,130.683 179.056,130.683